# Altium PCB exio_v2_0.PcbDoc
Units mm, origin at the board's own origin, x right, y up, seen from the top; angles counter-clockwise.
Board outline 48.01 x 70.99 mm, 2 copper layers (Top Layer, Bottom Layer); 34 components, 30 nets, 139 pads, 16 vias.
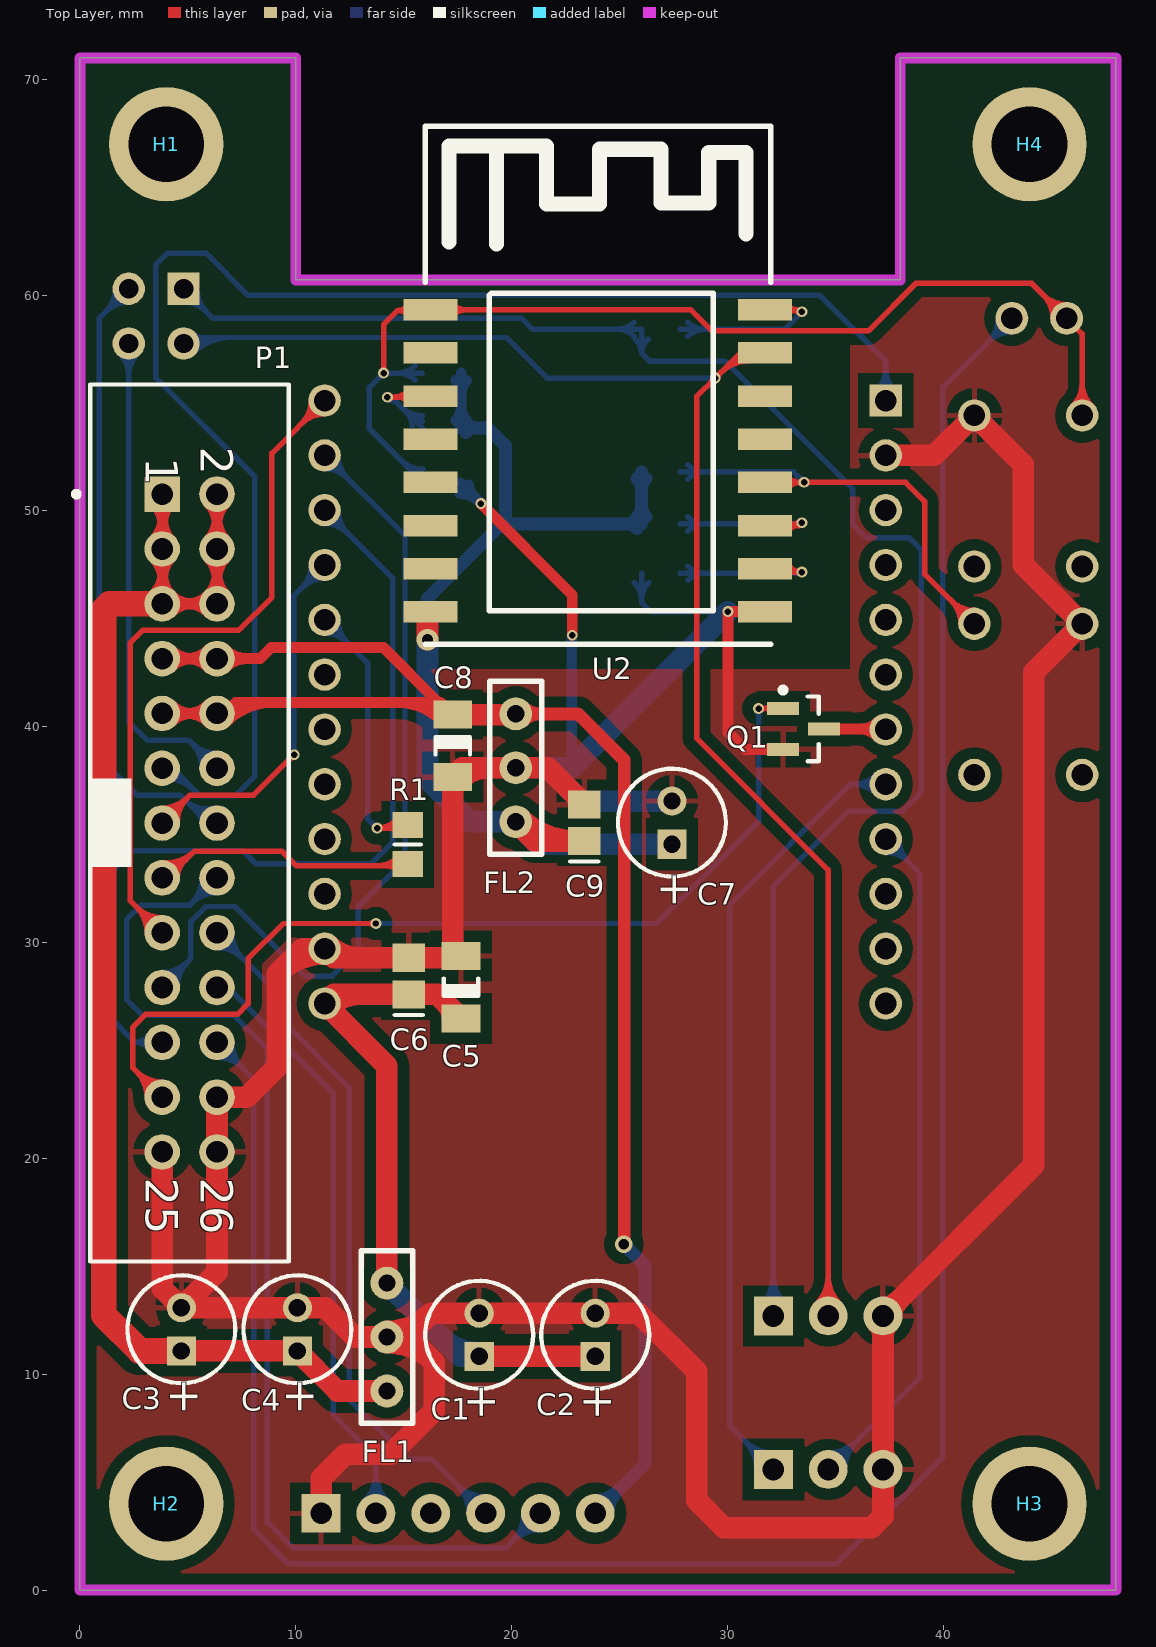
[diagram p0: Top Layer view]
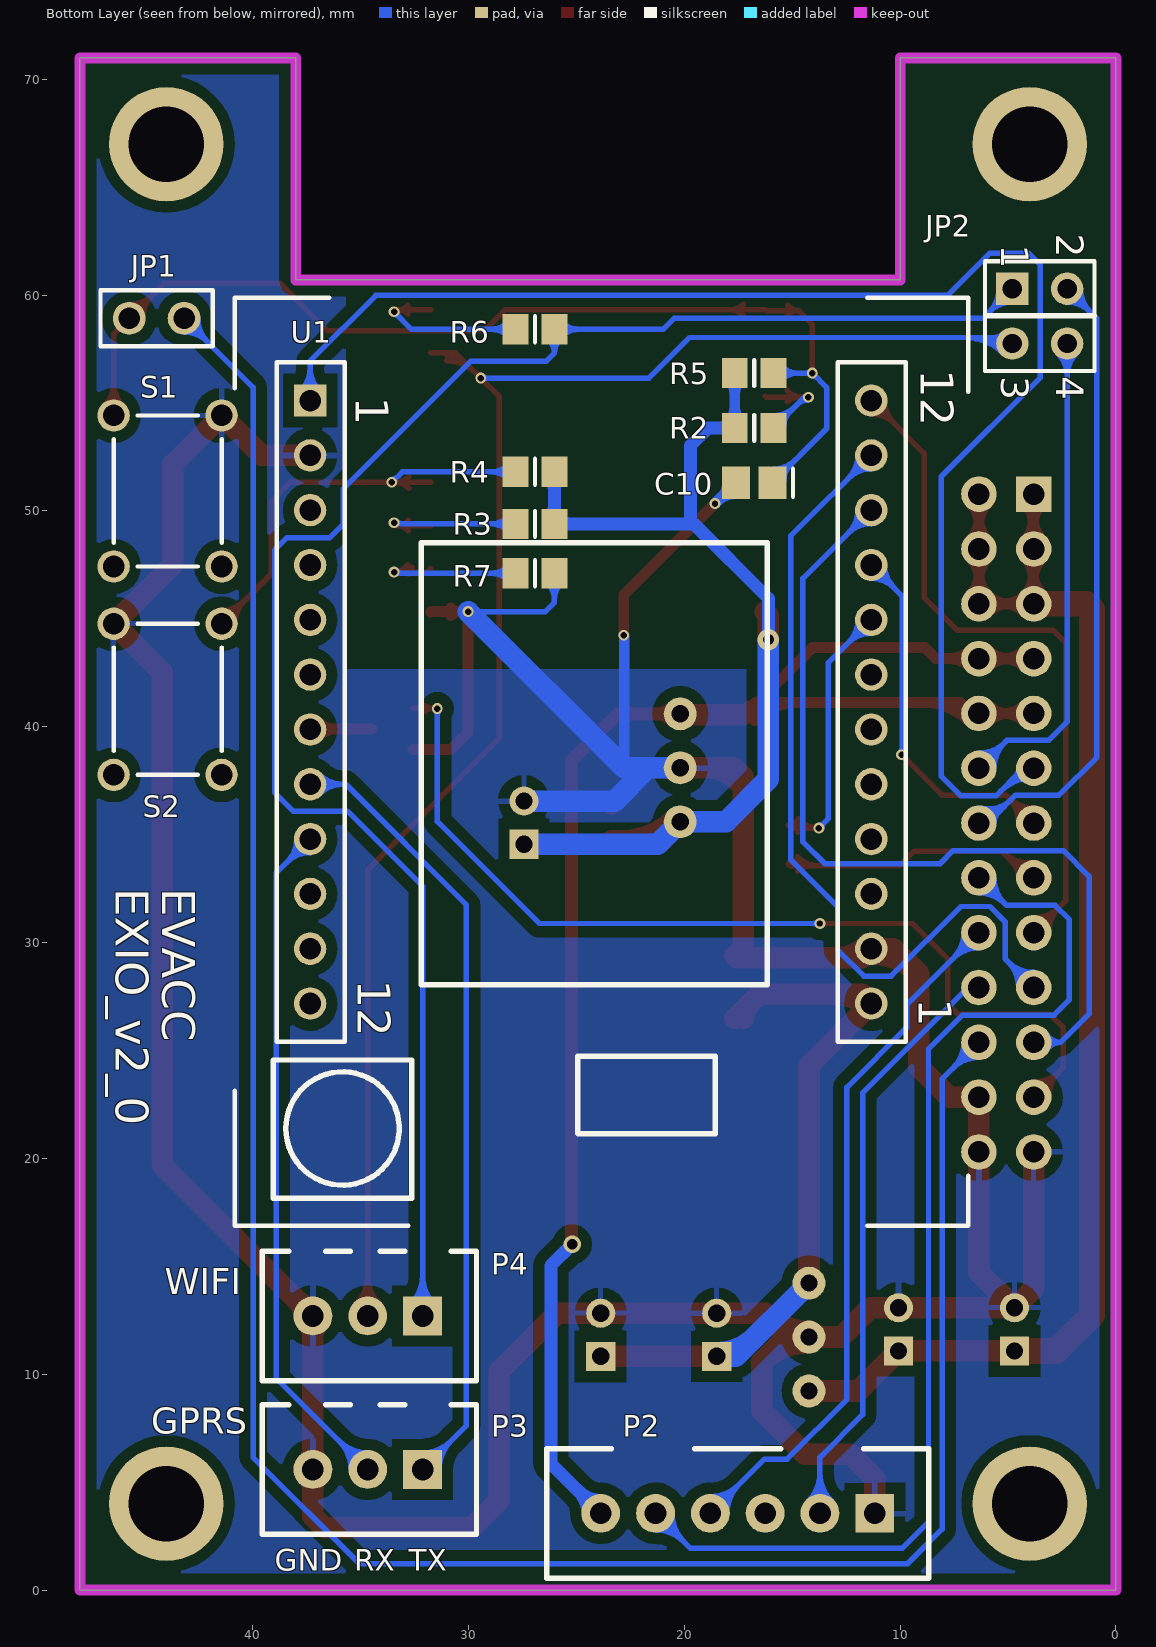
[diagram p1: Bottom Layer view, seen from below]

## Layer stack, top to bottom
Top Layer: signal copper 0.0356
Dielectric: dielectric 0.32, FR-4, Dk 4.8
Bottom Layer: signal copper 0.0356

## Board outline
0,0 0,70.993 10,70.993 10,60.706 38.006,60.706 38.006,70.993 48.006,70.993 48.006,0

## Design rules (kind name [scope] priority, off if disabled: settings)
Clearance Clearance_Region [InPolygon and InNetClass('Power')] p1: gap=0.52
Clearance Clearance_All [All] p2: gap=0.254
HoleSize [All] p1: absolutevalues=TRUE maxlimit=5 minlimit=0.3 maxpercent=80.000 minpercent=20.000
MinimumSolderMaskSliver [All] p1: minsoldermaskwidth=0.01
PolygonConnect [All] p1: connectstyle=Relief reliefconductorwidth=0.254 reliefentries=4 polygonreliefangle="90 Angle"
RoomDefinition U_wifi [InComponentClass('U_wifi')] p1: confinementstyle=ConfineOut formatcopy=TRUE lockcomponents=FALSE outline 49.53,32.512 65.913,32.512 65.913,40.005 49.53,40.005
RoomDefinition U_socket [InComponentClass('U_socket')] p2: confinementstyle=ConfineOut formatcopy=TRUE lockcomponents=FALSE outline 50.292,22.225 66.04,22.225 66.04,30.226 50.292,30.226
RoomDefinition U_GPRS [InComponentClass('U_GPRS')] p3: confinementstyle=ConfineOut formatcopy=TRUE lockcomponents=FALSE outline 50.419,12.192 66.04,12.192 66.04,20.193 50.419,20.193
RoomDefinition layout [InComponentClass('layout')] p4: confinementstyle=ConfineOut formatcopy=TRUE lockcomponents=FALSE outline 50.546,1.651 65.405,1.651 65.405,8.763 50.546,8.763
RoutingVias [All] p1: holewidth=0.3 width=0.5 viastyle="Through Hole" minholewidth=0.3 minwidth=0.5 maxholewidth=0.72 maxwidth=1.2
SilkToSilkClearance [All] p1: silktosilkclearance=0.01
SilkscreenOverComponentPads [All] p1: minsilkscreentomaskgap=0.01
SolderMaskExpansion [All] p1: expansion=0.102
TestPointUsage [All] p1: valid=0 allowmultiple=FALSE
Testpoint [All] p1: side=15 testpointundercomponent=TRUE minsize=1.016 maxsize=2.54 preferedsize=1.524 minholesize=0 maxholesize=1.016 preferedholesize=0.813 testpointgrid=0.025 style=1023 order=0123456789
Width [All] p1: maxlimit=2 minlimit=0.2 preferedwidth=0.254
20 further rules are at their usual default settings.

## Classes and differential pairs
component class U_wifi: C7 C8 C9 C10 FL2 JP1 JP2 R2 R3 R4 R6 R7 S1 S2 U2
component class U_GPRS: C1 C2 C3 C4 C5 C6 FL1 Q1 R1 U1
component class layout: H1 H2 H3 H4
component class U_socket: P1 P2 P3 P4
net class Power: +3V3 +5V E3V3 GND

## Components (designator, comment, footprint, x,y, rotation, side; value= is the part's Value field where it differs from the comment)
C1 "100uF 16V low ESR" CAPPR2-5x11 18.5,11.828 r90 top
C2 "100uF 16V low ESR" CAPPR2-5x11 23.876,11.828 r90 top
C3 "100uF 16V low ESR" CAPPR2-5x11 4.699,12.082 r90 top
C4 "100uF 16V low ESR" CAPPR2-5x11 10.075,12.082 r90 top
C5 "10uF 16V X7R" CAPC3216N 17.653,27.94 r90 top
C6 "100nF 50V X7R" CAPC2012N 15.24,28.448 r90 top
C7 "100uF 16V low ESR" CAPPR2-5x11 27.432,35.56 r90 top
C8 "10uF 16V X7R" CAPC3216N 17.272,39.116 r270 top
C9 "100nF 50V X7R" CAPC2012N 23.368,35.56 r90 top
C10 "100nF 50V X7R" CAPC2012N 16.764,51.308 r0 bottom
FL1 "DSS6NZ82A103" DSS6 14.224,11.724 r270 top
FL2 "DSS6NZ82A103" DSS6 20.193,38.1 r270 top
H1 "M3.0" SCREW_HOLE_3.5#1 5.334,64.389 r0 top locked
H2 "M3.0" SCREW_HOLE_3.5#2 7.366,3.937 r0 top locked
H3 "M3.0" SCREW_HOLE_3.5#3 43.434,3.937 r0 top locked
H4 "M3.0" SCREW_HOLE_3.5#4 43.942,64.897 r0 top locked
JP1 "SIP_2P_2.54" JP2-P2.54 44.45,58.928 r180 bottom
JP2 "Header 2X2" HDR2X2 4.801,60.3 r270 bottom
P1 "IDC2.54-V26D" IDC2.54-V26D 5.08,35.54 r270 top locked
P2 "XH2.54-6" REAL_SIP6_2.54 17.526,3.556 r0 bottom
P3 "SIP_3_2.54" REAL_SIP3_2.54 32.131,5.588 r0 bottom locked
P4 "SIP_3_2.54" REAL_SIP3_2.54 32.131,12.7 r0 bottom
Q1 "MGSF1N02L" SOT23-3N 33.528,39.903 r0 top
R1 "27R" RESC2012N 15.19,34.544 r90 top
R2 "10k 1%" RESC2012N 16.764,53.848 r180 bottom
R3 "10k 1%" RESC2012N 26.924,49.403 r0 bottom
R4 "10k 1%" RESC2012N 26.924,51.816 r0 bottom
R5 "10k 1%" RESC2012N 16.764,56.388 r180 bottom
R6 "27R" RESC2012N 26.924,58.42 r0 bottom
R7 "10k 1%" RESC2012N 26.924,47.117 r180 bottom
S1 "SW-PB" SW5X7 43.942,50.927 r270 bottom
S2 "SW-PB" SW5X7 43.942,41.275 r270 bottom
U1 "A6_GPRS" A6_GPRS_MOD 37.338,55.118 r180 bottom locked
U2 "ESP-12F" ESP-12F 24.003,52.324 r0 top locked

## Footprints (in the part's own frame and the unit in brackets; to place one, negate y for a bottom-side part, rotate by r counter-clockwise, add the part's x,y. Pads: shape width x height; smd on the part's side, far side on the other; paste and mask are expansions set on the pad)
A6_GPRS_MOD [mm] "2X排母2.54X12"
  rect 1.5x1.5 hole 1: 1(0,0)
  round 1.5 hole 1: 2(0,-2.54) 3(0,-5.08) 4(0,-7.62) 5(0,-10.16) 6(0,-12.7) 7(0,-15.24) 8(0,-17.78) 9(0,-20.32) 10(0,-22.86) 11(0,-25.4) 12(0,-27.94) 13(26,-27.94) 14(26,-25.4) 15(26,-22.86) 16(26,-20.32) 17(26,-17.78) 18(26,-15.24) 19(26,-12.7) 20(26,-10.16) 21(26,-7.62) 22(26,-5.08) 23(26,-2.54) 24(26,0)
  silkscreen extent -3.5,-38.24 30.5,4.76, body extent -3.58,-38.28 30.51,4.75, height 37
CAPC2012N [mm] "Chip Capacitor, Body 2.0x1.3mm, IPC Medium Density"
  rect 1.3x1.5 smd: 1(-0.85,0) 2(0.85,0)
  silkscreen extent -1.8,-0.65 -1.8,0.65, body extent -1.1,-0.72 1.1,0.72, height 1.1
CAPC3216N [mm] "Chip Capacitor, Body 3.2x1.6mm, IPC Medium Density"
  rect 1.3x1.8 smd: 1(-1.45,0) 2(1.45,0)
  silkscreen extent -0.4,-0.8 0.4,0.8, body extent -1.7,-0.9 1.7,0.9, height 1.35
CAPPR2-5x11 [mm] "Capacitor, Electrolytic, Radial; Body 5 x 11 mm (Dia.xH typ); Pin Spacing 2 mm (typ)"
  rect 1.35x1.35 hole 0.8: 1(-1,0)
  round 1.35 hole 0.8: 2(1,0)
  silkscreen extent -2.5,-2.5 2.5,2.5
DSS6 [mil] "Murata EMI supression filter"
  round 60 hole 31.5: 1(-98.43,0) 2(0,0) 3(98.43,0)
  silkscreen extent -157,-47 157,47, body extent -157,-47 157,47, height 276
ESP-12F [mm] "Ai-Thinker Wi-Fi module"
  rect 2.5x1 smd: 1(-7.75,7) 2(-7.75,5) 3(-7.75,3) 4(-7.75,1) 5(-7.75,-1) 6(-7.75,-3) 7(-7.75,-5) 8(-7.75,-7) 15(7.75,-7) 16(7.75,-5) 17(7.75,-3) 18(7.75,-1) 19(7.75,1) 20(7.75,3) 21(7.75,5) 22(7.75,7)
  silkscreen extent -8,-8.5 8,15.5, body extent -8.05,-8.53 8.03,15.49, height 2
HDR2X2 [mm] "Connector; Header; 2x2 Position"
  rect 1.5x1.5 hole 0.9: 1(0,0)
  round 1.5 hole 0.9: 2(0,2.54) 3(2.54,0) 4(2.54,2.54)
  silkscreen extent -1.27,-1.27 3.81,3.81
IDC2.54-V26D [mm] "Connector; IDC, Low Profile Male Header, Thru-Hole; 26 Position; Vertical; Pitch 2.54 mm; Body 40.64 x 9.2 x 9.45 mm (LxWxH)"
  rect 1.65x1.65 hole 1: 1(-15.24,-1.27)
  round 1.65 hole 1: 2(-15.24,1.27) 3(-12.7,-1.27) 4(-12.7,1.27) 5(-10.16,-1.27) 6(-10.16,1.27) 7(-7.62,-1.27) 8(-7.62,1.27) 9(-5.08,-1.27) 10(-5.08,1.27) 11(-2.54,-1.27) 12(-2.54,1.27) 13(0,-1.27) 14(0,1.27) 15(2.54,-1.27) 16(2.54,1.27) 17(5.08,-1.27) 18(5.08,1.27) 19(7.62,-1.27) 20(7.62,1.27) 21(10.16,-1.27) 22(10.16,1.27) 23(12.7,-1.27) 24(12.7,1.27) 25(15.24,-1.27) 26(15.24,1.27)
  silkscreen extent -20.32,-5.37 20.32,4.6, body extent -20.32,-4.6 20.32,4.6, height 9.45
JP2-P2.54 [mil] "2-pin jumper P2.54"
  round 60 hole 39.37: 1(-50,0) 2(50,0)
  silkscreen extent -102,-51 102,51, body extent -100,-50 100,50, height 319
REAL_SIP3_2.54 [mm]
  rect 1.8x1.8 hole 1: 1(0,0)
  round 1.8 hole 1: 2(2.54,0) 3(5.08,0)
  silkscreen extent -2.5,-3 7.42,3
REAL_SIP6_2.54 [mm]
  rect 1.8x1.8 hole 1: 1(-6.35,0)
  round 1.8 hole 1: 2(-3.81,0) 3(-1.27,0) 4(1.27,0) 5(3.81,0) 6(6.35,0)
  silkscreen extent -8.85,-3 8.85,3, body extent -8.76,-2.92 8.84,2.88, height 7
RESC2012N [mm] "Chip Resistor, Body 2.0x1.3mm, IPC Medium Density"
  rect 1.2x1.4 smd: 1(-0.9,0) 2(0.9,0)
  silkscreen extent 0,-0.6 0,0.6, body extent -1.07,-0.7 1.07,0.7, height 0.65
SCREW_HOLE_3.5#1 [mm]
  round 5.3 hole 3.5: 0(-1.334,2.611)
SCREW_HOLE_3.5#2 [mm]
  round 5.3 hole 3.5: 0(-3.366,0.063)
SCREW_HOLE_3.5#3 [mm]
  round 5.3 hole 3.5: 0(0.566,0.063)
SCREW_HOLE_3.5#4 [mm]
  round 5.3 hole 3.5: 0(0.058,2.103)
SOT23-3N [mm] "SOT23, 3-Leads, Body 2.9x1.3mm, Pitch 0.95mm, Lead Span 2.5mm, IPC Medium Density"
  rect 1.5x0.6 smd: 1(-0.95,0.95) 2(-0.95,-0.95) 3(0.95,0)
  silkscreen extent -1.07,-1.5 0.7,1.92, body extent -0.7,-1.5 0.7,1.5, height 1.1
SW5X7 [mm]
  round 1.5 hole 1: 1(-3.5,2.5) 2(-3.5,-2.5) 3(3.5,2.5) 4(3.5,-2.5)
  silkscreen extent -3.5,-2.5 3.5,2.5

## Part data
C1 C2 C3 C4 C7: library part "Cap Pol1", "Polarized Capacitor (Radial)"
C5 C6 C8 C9 C10: library part CAP
FL1 FL2: library part DSS6, "Murata EMI suppression filter"
H1 H2 H3 H4: library part SCRE_HOLE_3.2, "Screw hole for M3.0"
JP1: library part JUMPER, "Jumper"
JP2: "Header, 2-Pin, Dual row"
P1: library part "Header 13X2", "IDC2.54-13x2 Header"
P2: library part SWD-Connector, "SW debug connector"
P3 P4: library part "Header 3", "Header, 3-Pin"
Q1: library part MOSFET-N, "N-Channel MOSFET"
R1 R2 R3 R4 R5 R6 R7: library part RES1
U1: library part A6_GPRS_Module, "GPRS module"
U2: "Wi-Fi module"

## Via types
v1: diameter 0.5, hole 0.3, Top Layer to Bottom Layer, 14 vias
v2: diameter 1, hole 0.5, Top Layer to Bottom Layer, 1 vias
v3: diameter 0.8, hole 0.5, Top Layer to Bottom Layer, 1 vias

## Nets (pads, with @x,y where several pads share a name; then routed paths per layer and width w, separated by ;. In a path a pad name is that pad's centre, name@x,y a point inside that pad or via, vN(x,y) a via of type N, cw(c..) or ccw(c..) an arc to the next point about the centre after c; other vN are vias at no path point)
+3V3: C8.1 FL2.1 P1.7 P1.8 P1.9 P1.10 P2.6 | length 98.1
  Top Layer w0.5: P1.9 P1.10 6.711,40.62 7.223,41.132 C8.1@16.602,41.132 ; P1.7 P1.8 8.353,43.16 8.865,43.672 14.062,43.672 C8.1@16.602,41.132 ; P1.9@4.217,40.213 cw(c5.198,39.232) 5.198,40.62 cw(c5.198,42.008) P1.9@4.217,41.027 ; P1.7@4.217,42.753 cw(c5.198,41.772) 5.198,43.16 cw(c5.198,44.548) P1.7@4.217,43.567 ; P1.10@5.943,40.213 ccw(c4.962,39.232) 4.962,40.62 ccw(c4.962,42.008) P1.10@5.943,41.027 ; P1.8@5.943,42.753 ccw(c4.962,41.772) 4.962,43.16 ccw(c4.962,44.548) P1.8@5.943,43.567 ; P1.10@6.403,40.567 cw(c7.767,39.203) 7.767,41.132 ; P1.10@6.757,40.213 cw(c8.974,37.996) 8.974,41.132 ; P1.8@6.757,42.753 cw(c7.738,41.772) 7.738,43.16 cw(c7.738,44.548) P1.8@6.757,43.567 ; 14.69,41.132 cw(c14.69,38.234) C8.1@16.739,40.283 ; 15.897,41.132 cw(c15.897,39.441) C8.1@17.093,40.637 ; 16.236,41.498 cw(c15.303,40.566) C8.1@16.622,40.566 ; C8.1@16.589,41.145 ccw(c17.022,41.579) C8.1@17.022,40.966 ; C8.1@16.602,41.132 16.706,41.132 C8.1 17.168,40.566 C8.1@16.602,41.132
  Top Layer w0.6: FL2.1 23.078,40.6 25.222,38.456 25.222,16.002 v3(25.197,16.027) ; FL2.1@20.52,40.273 cw(c21.308,39.485) 21.308,40.6 cw(c21.308,41.715) FL2.1@20.52,40.927
  Top Layer w1: C8.1 20.159,40.566 FL2.1
  Bottom Layer w0.6: P2.6 26.187,5.867 26.187,15.037 v3(25.197,16.027) ; P2.6@23.876,4.156 ccw(c23.876,5.605) 24.9,4.58 ccw(c25.925,3.556) P2.6@24.476,3.556
+5V: C3.1 C4.1 FL1.3 P1.1 P1.2 P1.3 P1.4 P1.5 P1.6 | length 95.8
  Top Layer w0.254: P1.5@3.316,46.194 ccw(c2.125,47.385) 3.81,47.385 ccw(c5.495,47.385) P1.5@4.304,46.194 ; P1.3@3.316,47.746 cw(c2.125,46.555) 3.81,46.555 cw(c5.495,46.555) P1.3@4.304,47.746 ; P1.5@3.496,46.014 ccw(c2.738,46.772) 3.81,46.772 ccw(c4.882,46.772) P1.5@4.124,46.014 ; P1.3@3.496,47.926 cw(c2.738,47.168) 3.81,47.168 cw(c4.882,47.168) P1.3@4.124,47.926 ; P1.5 P1.3
  Top Layer w0.5: P1.5@3.403,46.107 ccw(c2.348,47.162) 3.841,47.162 ; P1.3@3.403,47.833 cw(c2.348,46.777) 3.841,46.777 ; P1.3@3.403,48.647 ccw(c2.348,49.702) 3.841,49.702 ; P1.1@3.403,50.373 cw(c2.348,49.317) 3.841,49.317 ; 3.841,46.926 cw(c5.124,46.926) P1.3@4.217,47.833 ; 3.841,47.014 ccw(c5.124,47.014) 4.217,46.107 ccw(c5.198,47.088) 5.198,45.7 ccw(c5.198,44.312) P1.5@4.217,45.293 ; 3.841,49.466 cw(c5.124,49.466) P1.1@4.217,50.373 ; 3.841,49.554 ccw(c5.124,49.554) P1.3@4.217,48.647 ; P1.1@3.841,50.78 3.841,48.24 3.841,45.731 P1.5 P1.6 P1.4 P1.2 ; P1.6@5.943,45.293 ccw(c4.962,44.312) 4.962,45.7 ccw(c4.962,47.088) 5.943,46.107 ccw(c4.962,47.088) 6.35,47.088 ccw(c7.738,47.088) P1.6@6.757,46.107 ; P1.4@5.943,47.833 cw(c4.962,46.852) 6.35,46.852 cw(c7.738,46.852) P1.4@6.757,47.833 ; P1.4@5.943,48.647 ccw(c4.962,49.628) 6.35,49.628 ccw(c7.738,49.628) P1.4@6.757,48.647 ; P1.2@5.943,50.373 cw(c4.962,49.392) 6.35,49.392 cw(c7.738,49.392) P1.2@6.757,50.373
  Top Layer w1: P1.1 P1.1@3.841,50.78 ; C3.1 C4.1 11.933,9.224 FL1.3
  Top Layer w1.2: P1.5 1.377,45.7 1.104,45.427 1.104,12.739 2.761,11.082 C3.1
E3V3: C7.1 C9.1 FL2.3 R2.1 R3.1 R4.1 R5.1 U2.8 | length 58.6
  Top Layer w1: v2(16.104,44.044) 16.104,45.175 U2.8 ; FL2.3@20.331,35.6 FL2.3 21.083,34.71 C9.1 ; FL2.3@20.378,35.785 ccw(c22.974,38.381) C9.1@22.974,34.71 ; C7.1@27.282,34.71 C7.1
  Bottom Layer w0.5: R2.1@17.416,54.195 ccw(c16.819,54.793) 17.664,54.793 ccw(c18.509,54.793) R2.1@17.911,54.195 ; R5.1@17.416,56.041 cw(c16.819,55.443) 17.664,55.443 cw(c18.509,55.443) R5.1@17.911,56.041 ; R2.1 R5.1
  Bottom Layer w0.6: v2(16.104,44.044) 16.104,45.949 19.558,49.403 19.71,49.403 ; R2.1 18.898,53.848 19.71,53.035 19.71,49.403 ; R2.1@17.876,53.636 cw(c18.388,53.124) 18.388,53.848 cw(c18.388,54.572) R2.1@17.876,54.06 ; R3.1@25.812,49.191 ccw(c25.3,48.679) 25.3,49.403 ccw(c25.3,50.127) R3.1@25.812,49.615 ; R3.1@25.812,49.715 ccw(c25.3,50.227) 26.024,50.227 ccw(c26.748,50.227) R3.1@26.236,49.715 ; R4.1@25.812,51.504 cw(c25.3,50.992) 26.024,50.992 cw(c26.748,50.992) R4.1@26.236,51.504 ; R4.1 R3.1 19.71,49.403
  Bottom Layer w1: v2(16.104,44.044) 16.104,37.567 18.07,35.6 FL2.3 21.233,34.56 C7.1
EN_WIFI: R2.2 U2.3 | length 9.1
  Top Layer w0.254: v1@14.224,55.27 v1(14.249,55.27) 16.199,55.27 U2.3 ; v1@14.336,55.183 cw(c14.546,54.973) 14.546,55.27 cw(c14.546,55.567) v1@14.336,55.357 ; v1@14.473,55.27 ccw(c14.473,56.354) U2.3@15.239,55.588 ; 14.732,55.27 cw(c14.732,54.553) U2.3@15.239,55.06
  Bottom Layer w0.254: v1@14.249,55.147 cw(c14.249,54.386) 14.787,54.925 ; v1(14.249,55.27) 14.442,55.27 R2.2 ; 14.886,54.826 ccw(c15.864,55.804) R2.2@15.864,54.421 ; 15.127,54.585 cw(c14.49,53.948) R2.2@15.391,53.948 ; R2.2@15.319,54.393 ccw(c15.864,54.937) R2.2@15.864,54.167
GND: C1.2 C2.2 C3.2 C4.2 C5.2 C6.2 C7.2 C8.2 C9.2 C10.2 FL1.2 FL2.2 P1.24 P1.25 P1.26 P2.1 P3.3 P4.3 Q1.2 R7.2 S1.1 S2.2 U1.2 U1.14 U2.15 | length 255.5
  Top Layer w0.254: C4.2 11.378,13.082 ; C4.2@10.285,12.876 cw(c10.774,12.398) 10.774,13.082 cw(c10.774,13.766) C4.2@10.285,13.288 ; C4.2@10.467,12.699 cw(c11.378,11.807) 11.378,13.082 ; C4.2@10.467,13.465 ccw(c11.378,14.357) 11.378,13.082 ; FL1.2@14.656,12.156 15.089,11.724 ; v1@30.11,45.252 cw(c30.284,45.078) 30.284,45.324 ; v1@30.11,45.426 ccw(c30.356,45.672) 30.356,45.324 ; U2.15@30.706,45.098 ccw(c30.251,44.753) v1@30.251,45.324 ; U2.15@30.706,45.55 cw(c30.251,45.895) v1@30.251,45.324 ; U2.15 v1@30.251,45.324
  Top Layer w0.5: FL2.2 FL2.2@20.447,38.1 ; 21.793,47.129 v1(18.579,50.343) 22.809,46.113 v1(22.809,44.247) ; 30.363,45.339 cw(c30.363,44.684) U2.15@30.826,45.147 ; 30.436,45.339 ccw(c30.436,45.891) U2.15@30.826,45.501 ; U2.15 31.738,45.339 v1(30.023,45.339) 30.023,39.741 30.81,38.953 Q1.2
  Top Layer w1: P1.25 3.81,13.971 C3.2 ; 9.16,28.566 cw(c11.338,26.388) U1.14@11.338,29.468 ; 9.8,29.205 cw(c10.73,28.275) U1.14@11.241,29.488 ; P2.1@10.893,3.839 ccw(c10.21,4.522) 11.176,4.522 ccw(c12.142,4.522) P2.1@11.459,3.839 ; P2.1 11.176,5.182 12.294,6.299 14.402,6.299 16.408,8.306 16.408,10.566 15.251,11.724 15.153,11.724 ; U1.14@11.515,29.895 ccw(c12.956,31.336) 12.956,29.298 ; FL1.2@14.224,11.462 cw(c14.224,8.35) 16.424,10.551 ; FL1.2@14.224,11.986 ccw(c14.224,14.861) 16.257,12.828 ; FL1.2@14.328,11.484 cw(c14.846,10.292) 15.764,11.211 ; 15.089,11.724 15.153,11.724 ; 17.272,30.068 ccw(c18.081,30.068) C5.2@17.509,29.496 ; C8.2@17.628,37.56 cw(c18.932,36.256) 18.932,38.1 ; FL2.2 17.706,38.1 C8.2 17.272,29.771 C5.2 17.561,29.298 C6.2 11.758,29.298 U1.14 10.312,29.718 9.144,28.55 9.144,24.257 7.727,22.84 P1.24 P1.26 6.35,14.733 C3.2 ; FL2.2@20.447,38.1 21.678,38.1 C9.2 ; P3.3@36.928,5.305 cw(c36.245,4.622) 37.211,4.622 cw(c38.177,4.622) P3.3@37.494,5.305 ; P3.3@36.928,5.871 ccw(c36.245,6.554) 37.211,6.554 ccw(c38.177,6.554) P3.3@37.494,5.871 ; P4.3@36.928,12.417 cw(c36.245,11.734) 37.211,11.734 cw(c38.177,11.734) P4.3@37.494,12.417 ; P4.3@37.211,13.1 ccw(c37.211,14.066) 37.894,13.383 ccw(c38.577,12.7) P4.3@37.611,12.7 ; U1.2 39.593,52.578 S1.1 43.713,52.156 43.713,47.504 S2.2 44.196,42.529 44.196,19.685 P4.3 P3.3 37.211,3.429 36.678,2.896 29.845,2.896 28.575,4.166 28.575,10.135 25.882,12.828 C2.2 C1.2 16.257,12.828 ; C3.2 C4.2 11.378,13.082 12.736,11.724 FL1.2 15.153,11.724 ; 15.153,11.724 16.257,12.828
  Bottom Layer w0.254: R7.2@25.69,46.683 cw(c24.882,45.875) 26.024,45.875 cw(c27.166,45.875) R7.2@26.358,46.683 ; R7.2 26.024,45.756 26.441,45.339 v1(30.023,45.339) ; v1@29.936,45.252 ccw(c29.726,45.042) 29.726,45.339 ccw(c29.726,45.636) v1@29.936,45.426
  Bottom Layer w0.5: C10.2@17.614,50.808 cw(c17.614,49.601) v1@18.468,50.454 ; C10.2 v1(18.579,50.343) ; C10.2@18.014,51.208 ccw(c18.738,51.208) C10.2@18.226,50.696 ; 22.784,38.1 22.784,44.221 v1(22.809,44.247)
  Bottom Layer w1: FL2.2@20.853,38.1 FL2.2 21.692,38.1 ; C7.2 23.232,36.56 21.692,38.1 ; v1(30.023,45.339) 22.784,38.1 21.692,38.1
GPIO0: R4.2 S2.1 U2.18 | length 32.4
  Top Layer w0.254: v1(33.553,51.333) v1@33.544,51.324 ; v1@33.64,51.246 cw(c33.828,51.059) 33.828,51.324 ; v1@33.64,51.42 ccw(c33.873,51.653) 33.873,51.324 ; S2.1@40.819,44.775 ccw(c39.315,44.775) 40.379,45.839 ccw(c41.442,46.902) S2.1@41.442,45.398 ; S2.1@41.073,44.775 ccw(c40.182,44.775) 40.812,45.405 ccw(c41.442,46.035) S2.1@41.442,45.144 ; S2.1 39.141,47.076 39.141,50.444 38.262,51.324 v1@33.544,51.324 ; v1@33.403,51.324 ccw(c33.403,50.424) 32.767,51.06 cw(c33.403,50.424) v1@33.403,51.324 ; v1@33.403,51.324 cw(c33.403,52.225) 32.767,51.588 ccw(c33.403,52.225) v1@33.403,51.324 ; v1@33.544,51.324 U2.18 v1@33.544,51.324 ; 33.234,51.324 ccw(c33.234,51.653) 33.466,51.42 cw(c33.234,51.653) 33.234,51.324 ; 33.279,51.324 cw(c33.279,51.059) 33.466,51.246 ccw(c33.279,51.059) 33.279,51.324
  Bottom Layer w0.254: R4.2 33.071,51.816 v1(33.553,51.333) ; R4.2@28.158,51.482 cw(c28.966,50.674) 28.966,51.816 cw(c28.966,52.958) R4.2@28.158,52.15 ; v1@33.43,51.333 ccw(c33.133,51.333) 33.343,51.543 ccw(c33.553,51.753) v1@33.553,51.456
GPIO2: R3.2 U2.17 | length 11.4
  Top Layer w0.254: U2.17 v1@33.322,49.324 ; U2.17@32.784,49.079 cw(c33.322,48.611) v1@33.322,49.324 ; U2.17@32.784,49.569 ccw(c33.322,50.037) v1@33.322,49.324 ; U2.17@32.842,49.324 ccw(c32.842,50.064) v1@33.365,49.541 ; v1(33.452,49.454) v1@33.322,49.324
  Bottom Layer w0.254: R3.2 33.401,49.403 v1(33.452,49.454) ; R3.2@28.158,49.069 cw(c28.966,48.261) 28.966,49.403 cw(c28.966,50.545) R3.2@28.158,49.737 ; 33.032,49.403 ccw(c33.032,49.873) v1@33.365,49.541
GPIO5: R7.1 U2.16 | length 11.6
  Top Layer w0.254: U2.16 31.909,47.168 v1(33.452,47.168) cw(c33.452,47.91) U2.16@32.82,47.52 ; U2.16@32.604,47.387 ccw(c32.996,47.629) U2.16@32.996,47.168 ; U2.16@32.767,47.06 cw(c33.026,46.801) 33.026,47.168 ; v1@33.365,47.081 ccw(c33.155,46.871) 33.155,47.168 ccw(c33.155,47.465) v1@33.365,47.255
  Bottom Layer w0.254: R7.1 33.401,47.117 v1(33.452,47.168) ; R7.1@28.158,46.783 cw(c28.966,45.975) 28.966,47.117 cw(c28.966,48.259) R7.1@28.158,47.451 ; 33.032,47.117 ccw(c33.032,47.587) v1@33.365,47.255
HST_RXD: P3.2 U1.9 | length 40.3
  Bottom Layer w0.254: P3.2 38.913,9.83 38.913,33.223 U1.9 ; P3.2@34.671,6.107 ccw(c34.671,7.36) 35.557,6.474 ccw(c36.443,5.588) P3.2@35.19,5.588 ; P3.2@34.671,6.361 ccw(c34.671,8.227) 35.991,6.908 ccw(c37.31,5.588) P3.2@35.444,5.588 ; U1.9@37.338,34.175 cw(c37.338,32.671) 38.402,33.734 cw(c39.465,34.798) U1.9@37.961,34.798 ; U1.9@37.338,34.429 cw(c37.338,33.538) 37.968,34.168 cw(c38.598,34.798) U1.9@37.707,34.798
HST_TXD: P3.1 U1.8 | length 45.2
  Bottom Layer w0.254: P3.1@31.358,5.588 ccw(c29.492,5.588) 30.811,6.908 ccw(c32.131,8.227) P3.1@32.131,6.361 ; P3.1@31.612,5.588 ccw(c30.359,5.588) 31.245,6.474 ccw(c32.131,7.36) P3.1@32.131,6.107 ; P3.1 30.099,7.62 30.099,31.75 35.687,37.338 U1.8 ; U1.8@36.897,36.897 ccw(c35.834,35.834) 35.834,37.338 ccw(c35.834,38.842) U1.8@36.897,37.779 ; U1.8@37.077,37.077 ccw(c36.447,36.447) 36.447,37.338 ccw(c36.447,38.229) U1.8@37.077,37.599
NetC1_1: C1.1 C2.1 C5.1 C6.1 FL1.1 U1.13 | length 36.5
  Top Layer w1: U1.13@11.515,27.001 cw(c12.956,25.56) 12.956,27.598 ; FL1.1 14.224,24.292 U1.13 11.758,27.598 C6.1 16.545,27.598 C5.1 ; 16.97,27.173 cw(c16.287,26.49) C5.1@17.253,26.49 ; C1.1 C2.1
  Bottom Layer w1: FL1.1 17.62,10.828 C1.1 ; 16.699,11.749 ccw(c18.5,13.549) C1.1@18.5,11.003
NetJP2_1: JP2.1 P4.1 R6.1 | length 92.3
  Bottom Layer w0.254: JP2.1@4.801,59.677 cw(c4.801,58.173) 5.864,59.236 cw(c6.928,60.3) JP2.1@5.424,60.3 ; JP2.1@4.801,59.931 cw(c4.801,59.04) 5.431,59.67 cw(c6.06,60.3) JP2.1@5.17,60.3 ; JP2.1 6.172,58.928 20.472,58.928 20.98,58.42 R6.1 ; R6.1@25.69,58.086 ccw(c24.882,57.278) 24.882,58.42 ccw(c24.882,59.562) R6.1@25.69,58.754 ; R6.1@25.722,57.956 cw(c25.189,57.313) 26.024,57.313 ; R6.1@26.024,58.228 26.024,57.313 ; R6.1@26.326,57.956 ccw(c26.859,57.313) 26.024,57.313 ; P4.1@31.584,13.247 ccw(c30.265,14.566) 32.131,14.566 ccw(c33.997,14.566) P4.1@32.678,13.247 ; P4.1@31.764,13.067 ccw(c30.878,13.953) 32.131,13.953 ccw(c33.384,13.953) P4.1@32.498,13.067 ; P4.1 32.131,32.614 35.611,36.093 38.125,36.093 38.989,36.957 38.989,48.184 38.405,48.768 36.424,48.768 35.814,49.378 35.814,51.029 29.896,56.947 26.391,56.947 26.024,57.313
NetJP2_3: JP2.3 P4.2 U2.21 | length 88.2
  Top Layer w0.254: v1@29.316,56.159 cw(c29.019,56.159) 29.229,55.949 cw(c29.439,55.739) v1@29.439,56.036 ; v1@29.439,56.282 ccw(c29.439,56.579) 29.649,56.369 ccw(c29.859,56.159) v1@29.562,56.159 ; 29.684,56.405 cw(c31.003,55.085) U2.21@31.003,56.951 ; 30.117,56.838 cw(c31.003,55.952) U2.21@31.003,57.205 ; U2.21 30.603,57.324 v1(29.439,56.159) 28.575,55.296 28.575,39.472 34.671,33.376 P4.2 ; P4.2@34.124,13.247 ccw(c32.805,14.566) 34.671,14.566 ccw(c36.537,14.566) P4.2@35.218,13.247 ; P4.2@34.304,13.067 ccw(c33.418,13.953) 34.671,13.953 ccw(c35.924,13.953) P4.2@35.038,13.067
  Bottom Layer w0.254: JP2.3 5.08,58.039 19.761,58.039 21.641,56.159 v1(29.439,56.159) ; JP2.3@4.882,57.678 cw(c5.753,56.807) 5.753,58.039 ; JP2.3@5.062,57.499 cw(c6.366,56.194) 6.366,58.039 ; JP2.3@5.241,57.319 cw(c6.979,55.581) 6.979,58.039 ; JP2.3@5.241,58.2 ccw(c5.63,58.589) 5.63,58.039 ; v1@29.352,56.072 ccw(c29.142,55.862) 29.142,56.159 ccw(c29.142,56.456) v1@29.352,56.246
NetQ1_3: Q1.3 U1.7 | length 4.8
  Top Layer w0.5: Q1.3 37.313,39.903 U1.7 ; 36.07,39.903 cw(c36.07,38.61) U1.7@36.984,39.524 ; 36.192,39.903 ccw(c36.192,41.024) U1.7@36.984,40.232
NetR1_2: R1.2 U1.20 | length 19.1
  Top Layer w0.254: v1@13.854,35.219 cw(c14.064,35.009) 14.064,35.306 cw(c14.064,35.603) v1@13.854,35.393 ; 14.281,35.306 cw(c14.281,34.635) R1.2@14.756,35.11 ; 14.317,35.306 ccw(c14.317,36.103) R1.2@14.923,35.586 ; R1.2@14.73,35.751 cw(c13.767,36.571) v1(13.767,35.306) 15.052,35.306 R1.2
  Bottom Layer w0.254: U1.20@11.338,44.335 cw(c11.338,42.831) 12.402,43.894 cw(c13.465,44.958) U1.20@11.961,44.958 ; U1.20@11.338,44.589 cw(c11.338,43.698) 11.968,44.328 cw(c12.598,44.958) U1.20@11.707,44.958 ; U1.20 13.335,42.961 13.335,35.738 v1(13.767,35.306) ; v1@13.644,35.306 ccw(c13.347,35.306) 13.557,35.516 ccw(c13.767,35.726) v1@13.767,35.429
NetR6_2: R6.2 U2.22 | length 11.4
  Top Layer w0.254: U2.22 v1@33.222,59.324 ; U2.22@32.808,59.109 cw(c33.222,58.817) v1@33.222,59.324 ; U2.22@32.808,59.539 ccw(c33.222,59.831) v1@33.222,59.324 ; U2.22@32.935,59.324 cw(c32.935,58.716) v1@33.365,59.146 ; v1@33.223,59.323 33.223,59.309 33.299,59.233 v1(33.452,59.233)
  Bottom Layer w0.254: R6.2 32.639,58.42 v1(33.452,59.233) ; R6.2@28.158,58.086 cw(c28.966,57.278) 28.966,58.42 cw(c28.966,59.562) R6.2@28.158,58.754 ; v1@33.329,59.233 cw(c33.032,59.233) 33.242,59.023 cw(c33.452,58.813) v1@33.452,59.11
NRST: P1.20 P2.2 | length 32.6
  Bottom Layer w0.254: P1.20 6.853,27.92 11.735,23.038 11.735,8.128 13.716,6.147 P2.2 ; P2.2@13.169,4.103 ccw(c11.85,5.422) 13.716,5.422 ccw(c15.582,5.422) P2.2@14.263,4.103 ; P2.2@13.349,3.923 ccw(c12.463,4.809) 13.716,4.809 ccw(c14.969,4.809) P2.2@14.083,3.923
RST: C10.1 JP1.1 R5.2 S1.2 U2.1 | length 65.2
  Top Layer w0.254: v1@13.985,56.475 ccw(c13.775,56.685) 14.072,56.685 ccw(c14.369,56.685) v1@14.159,56.475 ; v1(14.072,56.388) 14.072,58.649 14.707,59.284 ; U2.1@15.198,59.539 cw(c14.707,59.884) 14.707,59.284 ; U2.1@15.238,59.062 ccw(c14.707,58.537) 14.707,59.284 ; U2.1@17.267,59.06 cw(c17.904,58.423) 17.904,59.324 cw(c17.904,60.224) U2.1@17.267,59.588 ; JP1.1@45.085,58.928 ccw(c43.552,58.928) 44.636,60.012 ccw(c45.72,61.096) JP1.1@45.72,59.563 ; JP1.1@45.339,58.928 ccw(c44.419,58.928) 45.07,59.578 ccw(c45.72,60.229) JP1.1@45.72,59.309 ; S1.2@46.001,54.868 ccw(c44.938,55.931) 46.442,55.931 ccw(c47.946,55.931) S1.2@46.883,54.868 ; S1.2@46.181,54.688 ccw(c45.551,55.318) 46.442,55.318 ccw(c47.333,55.318) S1.2@46.703,54.688 ; S1.2 46.442,58.206 JP1.1 44.094,60.554 38.746,60.554 36.536,58.344 29.286,58.344 28.306,59.324 U2.1 16.213,59.284 14.707,59.284
  Bottom Layer w0.254: v1@13.949,56.388 cw(c13.652,56.388) 13.862,56.178 cw(c14.072,55.968) v1@14.072,56.265 ; v1@14.159,56.301 cw(c14.369,56.091) 14.369,56.388 cw(c14.369,56.685) v1@14.159,56.475 ; 14.85,52.372 ccw(c15.914,53.435) C10.1@15.914,51.931 ; 15.092,52.13 cw(c14.37,51.408) C10.1@15.391,51.408 ; C10.1@15.284,51.938 ccw(c15.914,52.568) C10.1@15.914,51.677 ; R5.2@15.53,56.054 ccw(c14.722,55.246) 14.722,56.388 ccw(c14.722,57.53) R5.2@15.53,56.722 ; R5.2 v1(14.072,56.388) 13.411,55.728 13.411,53.811 C10.1
SWCLK: P1.18 P2.4 | length 41.9
  Bottom Layer w0.254: P1.18@6.35,29.762 cw(c6.35,28.077) 7.542,29.268 cw(c8.733,30.46) P1.18@7.048,30.46 ; P1.18@6.35,30.016 cw(c6.35,28.944) 7.108,29.702 cw(c7.866,30.46) P1.18@6.794,30.46 ; P1.18 9.703,27.107 9.703,26.06 12.471,23.292 12.471,8.839 15.24,6.071 16.281,6.071 P2.4 ; P2.4@18.023,3.556 ccw(c16.157,3.556) 17.476,4.876 ccw(c18.796,6.195) P2.4@18.796,4.329 ; P2.4@18.277,3.556 ccw(c17.024,3.556) 17.91,4.442 ccw(c18.796,5.328) P2.4@18.796,4.075
SWDIO: P1.16 P2.5 | length 61.2
  Bottom Layer w0.254: P1.16@5.652,33 cw(c3.967,33) 5.158,31.808 cw(c6.35,30.617) P1.16@6.35,32.302 ; P1.16@5.906,33 cw(c4.834,33) 5.592,32.242 cw(c6.35,31.484) P1.16@6.35,32.556 ; P1.16 5.075,31.725 2.819,31.725 2.159,31.064 2.159,27.356 2.87,26.645 7.112,26.645 8.687,25.07 8.687,3.15 9.906,1.93 19.71,1.93 P2.5 ; P2.5@20.563,3.556 cw(c18.697,3.556) 20.016,2.236 cw(c21.336,0.917) P2.5@21.336,2.783 ; P2.5@20.817,3.556 cw(c19.564,3.556) 20.45,2.67 cw(c21.336,1.784) P2.5@21.336,3.037
U1_RESET: JP1.2 P1.22 | length 120.2
  Bottom Layer w0.254: P1.22@6.35,24.682 cw(c6.35,22.997) 7.542,24.188 cw(c8.733,25.38) P1.22@7.048,25.38 ; P1.22@6.35,24.936 cw(c6.35,23.864) 7.108,24.622 cw(c7.866,25.38) P1.22@6.794,25.38 ; P1.22 8.052,23.678 8.052,2.819 9.652,1.219 35.052,1.219 39.98,6.147 39.98,55.728 JP1.2 ; JP1.2@42.545,58.928 cw(c41.012,58.928) 42.096,57.844 cw(c43.18,56.76) JP1.2@43.18,58.293 ; JP1.2@42.799,58.928 cw(c41.879,58.928) 42.53,58.278 cw(c43.18,57.627) JP1.2@43.18,58.547
U1_RXD: JP2.2 P1.14 | length 36.8
  Bottom Layer w0.254: JP2.2@1.638,60.3 cw(c0.134,60.3) 1.197,59.236 cw(c2.261,58.173) JP2.2@2.261,59.677 ; JP2.2@1.892,60.3 cw(c1.001,60.3) 1.631,59.67 cw(c2.261,59.04) JP2.2@2.261,59.931 ; JP2.2 0.889,58.928 0.889,38.583 2.642,36.83 4.648,36.83 5.938,35.54 P1.14 ; 4.854,36.624 ccw(c5.9,37.67) P1.14@6.206,36.223 ; 5.185,36.293 ccw(c6.015,37.123) P1.14@6.258,35.974 ; 5.45,36.029 cw(c4.961,35.54) P1.14@5.652,35.54 ; 5.517,35.962 ccw(c6.131,36.576) P1.14@6.311,35.726
U1_TXD: JP2.4 P1.12 | length 30.6
  Bottom Layer w0.254: JP2.4@1.82,57.319 cw(c0.757,56.256) 2.261,56.256 cw(c3.765,56.256) JP2.4@2.701,57.319 ; JP2.4@2,57.499 cw(c1.37,56.869) 2.261,56.869 cw(c3.151,56.869) JP2.4@2.522,57.499 ; JP2.4 2.261,40.234 3.124,39.37 5.055,39.37 6.345,38.08 P1.12 ; 5.149,39.275 ccw(c6.35,40.476) P1.12@6.35,38.778 ; 5.162,39.262 cw(c3.98,38.08) P1.12@5.652,38.08 ; 5.583,38.842 ccw(c6.35,39.609) P1.12@6.35,38.524 ; 5.596,38.829 cw(c4.847,38.08) P1.12@5.906,38.08
U2_CTS: P1.17 U1.24 | length 39.7
  Top Layer w0.254: P1.17@3.112,30.46 ccw(c1.427,30.46) 2.618,31.652 ccw(c3.81,32.843) P1.17@3.81,31.158 ; P1.17@3.366,30.46 ccw(c2.294,30.46) 3.052,31.218 ccw(c3.81,31.976) P1.17@3.81,30.904 ; P1.17 2.337,31.933 2.337,43.901 2.911,44.475 7.366,44.475 8.89,45.999 8.89,52.67 U1.24 ; U1.24@10.715,55.118 cw(c9.211,55.118) 10.274,54.054 cw(c11.338,52.991) U1.24@11.338,54.495 ; U1.24@10.969,55.118 cw(c10.078,55.118) 10.708,54.488 cw(c11.338,53.858) U1.24@11.338,54.749
U2_EN: P1.11 U1.1 | length 75.9
  Bottom Layer w0.254: P1.11 4.287,38.08 5.563,36.805 7.188,36.805 8.103,37.719 8.103,51.587 3.505,56.185 3.505,61.392 4.064,61.951 5.842,61.951 7.798,59.995 34.29,59.995 37.338,56.947 U1.1 ; P1.11@3.811,37.89 cw(c3.821,36.305) 4.941,37.426 ; P1.11@3.813,37.636 cw(c3.826,35.451) 5.371,36.996 ; P1.11@4.508,38.08 ccw(c5.041,38.08) 4.664,37.703 ; U1.1@36.897,55.559 ccw(c35.834,56.622) 37.338,56.622 ccw(c38.842,56.622) U1.1@37.779,55.559 ; U1.1@37.077,55.379 ccw(c36.447,56.009) 37.338,56.009 ccw(c38.229,56.009) U1.1@37.599,55.379
U2_RESET: P1.23 Q1.1 | length 51.2
  Top Layer w0.254: P1.23@3.112,22.84 ccw(c1.427,22.84) 2.618,24.032 ccw(c3.81,25.223) P1.23@3.81,23.538 ; P1.23@3.366,22.84 ccw(c2.294,22.84) 3.052,23.598 ccw(c3.81,24.356) P1.23@3.81,23.284 ; P1.23 2.438,24.212 2.438,26.06 3.048,26.67 7.29,26.67 7.798,27.178 7.798,29.261 9.423,30.886 v1(13.716,30.886) ; v1@13.629,30.799 ccw(c13.419,30.589) 13.419,30.886 ccw(c13.419,31.183) v1@13.629,30.973 ; v1(31.445,40.843) 31.455,40.853 Q1.1 ; v1@31.532,40.756 cw(c31.767,40.522) 31.767,40.853 ; v1@31.532,40.93 ccw(c31.717,41.115) 31.717,40.853 ; Q1.1@32.006,40.731 ccw(c31.71,40.436) 31.71,40.853 ccw(c31.71,41.271) Q1.1@32.006,40.976
  Bottom Layer w0.254: v1(13.716,30.886) 26.721,30.886 31.445,35.611 v1(31.445,40.843) ; v1@13.803,30.799 cw(c14.013,30.589) 14.013,30.886 cw(c14.013,31.183) v1@13.803,30.973 ; v1@31.358,40.756 cw(c31.148,40.546) 31.445,40.546 cw(c31.742,40.546) v1@31.532,40.756
U2_RTS: P1.19 U1.23 | length 46.9
  Bottom Layer w0.254: P1.19 5.131,29.241 5.131,30.963 5.842,31.674 7.188,31.674 10.414,28.448 11.684,28.448 12.903,29.667 12.903,31.674 15.062,33.833 15.062,48.854 U1.23 ; P1.19@3.81,28.364 ccw(c3.81,29.436) 4.568,28.678 ccw(c5.326,27.92) P1.19@4.254,27.92 ; P1.19@3.81,28.618 ccw(c3.81,30.303) 5.002,29.112 ccw(c6.193,27.92) P1.19@4.508,27.92 ; U1.23@11.338,51.955 cw(c11.338,50.451) 12.402,51.514 cw(c13.465,52.578) U1.23@11.961,52.578 ; U1.23@11.338,52.209 cw(c11.338,51.318) 11.968,51.948 cw(c12.598,52.578) U1.23@11.707,52.578
U2_RXD: P1.15 R1.1 | length 19
  Top Layer w0.254: P1.15 4.069,33 5.309,34.239 ; P1.15@3.823,33.19 ccw(c3.885,34.085) 4.52,33.45 ; P1.15@3.841,33.443 ccw(c3.936,34.823) 4.914,33.845 ; P1.15@3.858,33.696 ccw(c3.987,35.56) 5.309,34.239 ; P1.15@4.508,33 cw(c5.567,33) 4.818,33.749 ; 13.729,33.553 ccw(c13.729,35.005) R1.1@14.756,33.978 ; 14.167,33.553 cw(c14.167,32.721) R1.1@14.756,33.31 ; 14.343,33.553 ccw(c14.343,34.391) R1.1@14.935,33.799 ; R1.1 15.099,33.553 10.036,33.553 9.351,34.239 5.309,34.239
U2_SLEEP: P1.21 U1.22 | length 45.9
  Bottom Layer w0.254: P1.21@3.216,25.014 ccw(c2.56,24.61) 2.56,25.38 ; P1.21@3.216,25.746 cw(c2.56,26.15) 2.56,25.38 ; P1.21 2.56,25.38 ; U1.22@11.338,49.415 cw(c11.338,47.911) 12.402,48.974 cw(c13.465,50.038) U1.22@11.961,50.038 ; U1.22@11.338,49.669 cw(c11.338,48.778) 11.968,49.408 cw(c12.598,50.038) U1.22@11.707,50.038 ; U1.22 14.503,46.873 14.503,34.671 13.487,33.655 8.153,33.655 7.544,34.265 2.438,34.265 1.245,33.071 1.245,26.695 2.56,25.38
U2_TXD: P1.13 U1.21 | length 25.7
  Top Layer w0.254: P1.13 5.1,36.83 8.052,36.83 9.906,38.684 v1(9.931,38.71) ; P1.13@3.81,35.984 ccw(c3.81,37.056) 4.568,36.298 ccw(c5.326,35.54) P1.13@4.254,35.54 ; P1.13@3.81,36.238 ccw(c3.81,37.923) 5.002,36.732 ccw(c6.193,35.54) P1.13@4.508,35.54 ; v1@9.808,38.71 cw(c9.511,38.71) 9.721,38.5 cw(c9.931,38.29) v1@9.931,38.587
  Bottom Layer w0.254: 9.906,39.068 ccw(c10.29,39.068) v1@10.018,38.797 ; v1(9.931,38.71) 9.906,38.735 9.906,46.066 U1.21 ; U1.21@10.715,47.498 cw(c9.211,47.498) 10.274,46.434 cw(c11.338,45.371) U1.21@11.338,46.875 ; U1.21@10.969,47.498 cw(c10.078,47.498) 10.708,46.868 cw(c11.338,46.238) U1.21@11.338,47.129
pads on no net: H1.0 H2.0 H3.0 H4.0 P2.3 S1.3 S1.4 S2.3 S2.4 U1.3 U1.4 U1.5 U1.6 U1.10 U1.11 U1.12 U1.15 U1.16 U1.17 U1.18 U1.19 U2.2 U2.4 U2.5 U2.6 U2.7 U2.19 U2.20

## Polygon pours and split planes (outlines as drawn)
GND on Top Layer "Top Layer-GND" (solid, remove dead copper, pour order 1000): 48.006,70.993 0,70.993 0,0 48.006,0
GND on Bottom Layer "Bottom Layer-GND" (solid, remove dead copper, pour order 1001): 48.006,70.993 0,70.993 0,0 48.006,0

## Keep-outs
Keep-Out Layer:
  the board outline again, w0.5

## Other copper
Top Layer:
  pour cut-out: 35.687,60.706 12.827,60.706 12.827,42.672 35.687,42.672
Bottom Layer:
  pour cut-out: 35.687,60.706 12.827,60.706 12.827,42.672 35.687,42.672

## Silkscreen, mask and mechanical layers (free items; w line width, h text height)
Bottom Overlay:
  lines w0.254: 1.016,59.055 5.969,59.055
  text "EVACC" at 44.196,32.512 h1.52 r90
  text "EXIO_v2_0" at 46.355,32.512 h1.52 r90
  text "WIFI" at 44.069,13.716 h1.2
  text "GPRS" at 44.704,7.239 h1.2
  text "TX" at 32.766,0.889 h1
  text "RX" at 35.306,0.889 h1
  text "GND" at 38.989,0.889 h1

## Text inside footprints (layer, text, board x,y; h text height)
C1: Top Overlay "+" at 19.25,7.853 h1.5 r90
C2: Top Overlay "+" at 24.626,7.853 h1.5 r90
C3: Top Overlay "+" at 5.449,8.107 h1.5 r90
C4: Top Overlay "+" at 10.825,8.107 h1.5 r90
C7: Top Overlay "+" at 28.182,31.585 h1.5 r90
JP2: Bottom Overlay "3" at 5.309,56.236 h1.27 r90; Bottom Overlay "4" at 2.769,56.236 h1.27 r90; Bottom Overlay "2" at 2.769,62.84 h1.27 r90; Bottom Overlay "1" at 5.309,62.332 h1.27 r90
P1: Top Overlay "25" at 3.06,19.1 h1.5 r270; Top Overlay "26" at 5.6,19.1 h1.5 r270; Top Overlay "1" at 3.06,52.48 h1.5 r270; Top Overlay "2" at 5.6,52.98 h1.5 r270
U1: Bottom Overlay "1" at 35.23,55.296 h1.52 r90; Bottom Overlay "12" at 35.128,28.27 h1.52 r90; Bottom Overlay "12" at 9.042,56.566 h1.52 r90; Bottom Overlay "1" at 9.144,27.432 h1.52 r90